# Altium PCB IoTMainBoard.PcbDoc (part 1 of 2)
Units mil, origin at the board's own origin, x right, y up, seen from the top; angles counter-clockwise.
Board outline 3945 x 3790 mil, 2 copper layers (Top Layer, Bottom Layer); 64 components, 75 nets, 263 pads, 93 vias.
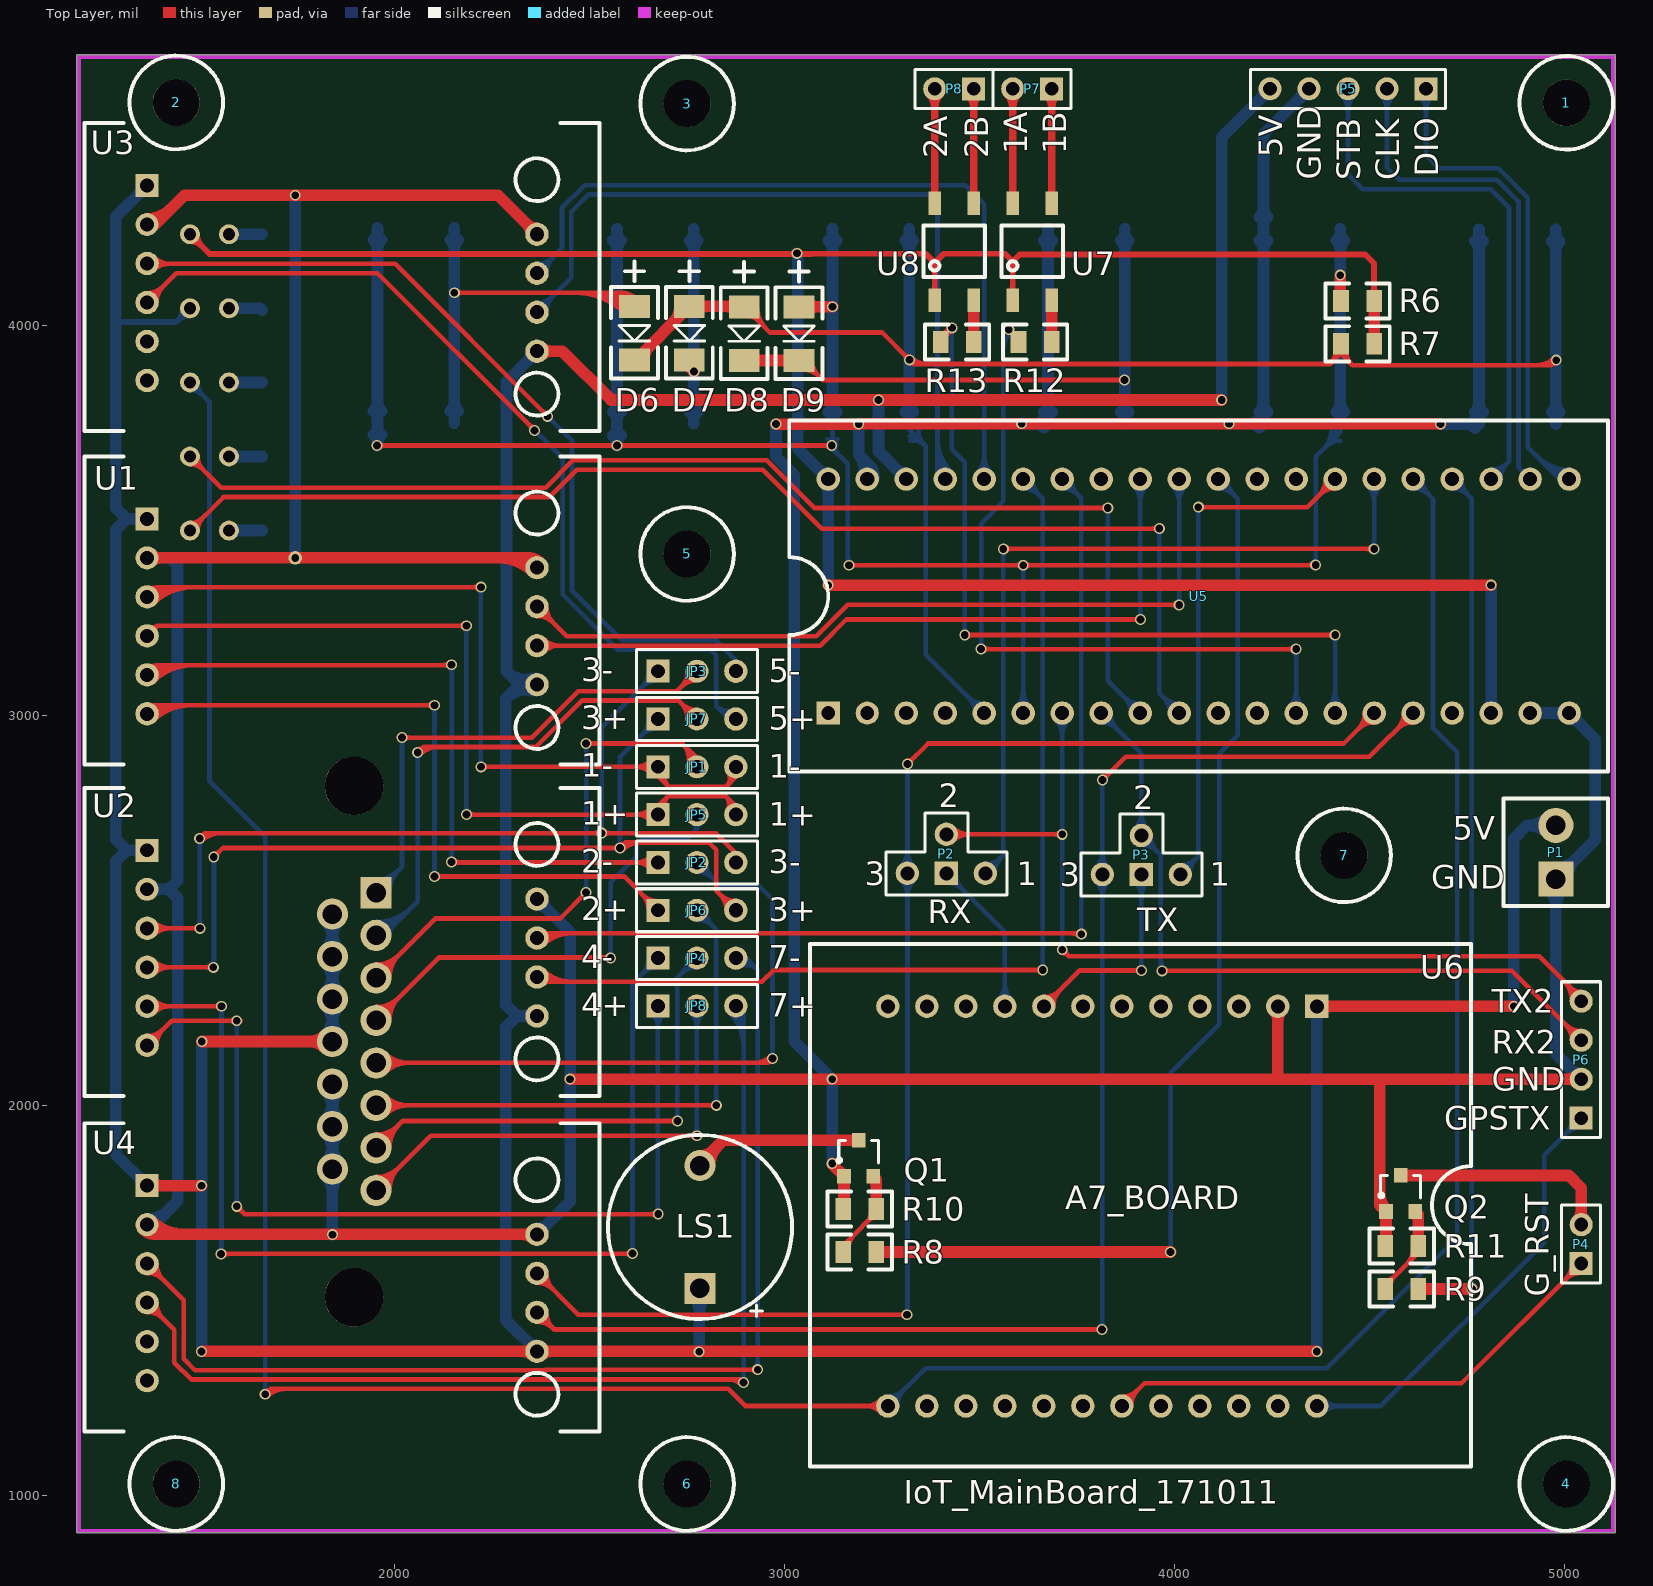
[diagram p0: Top Layer view]
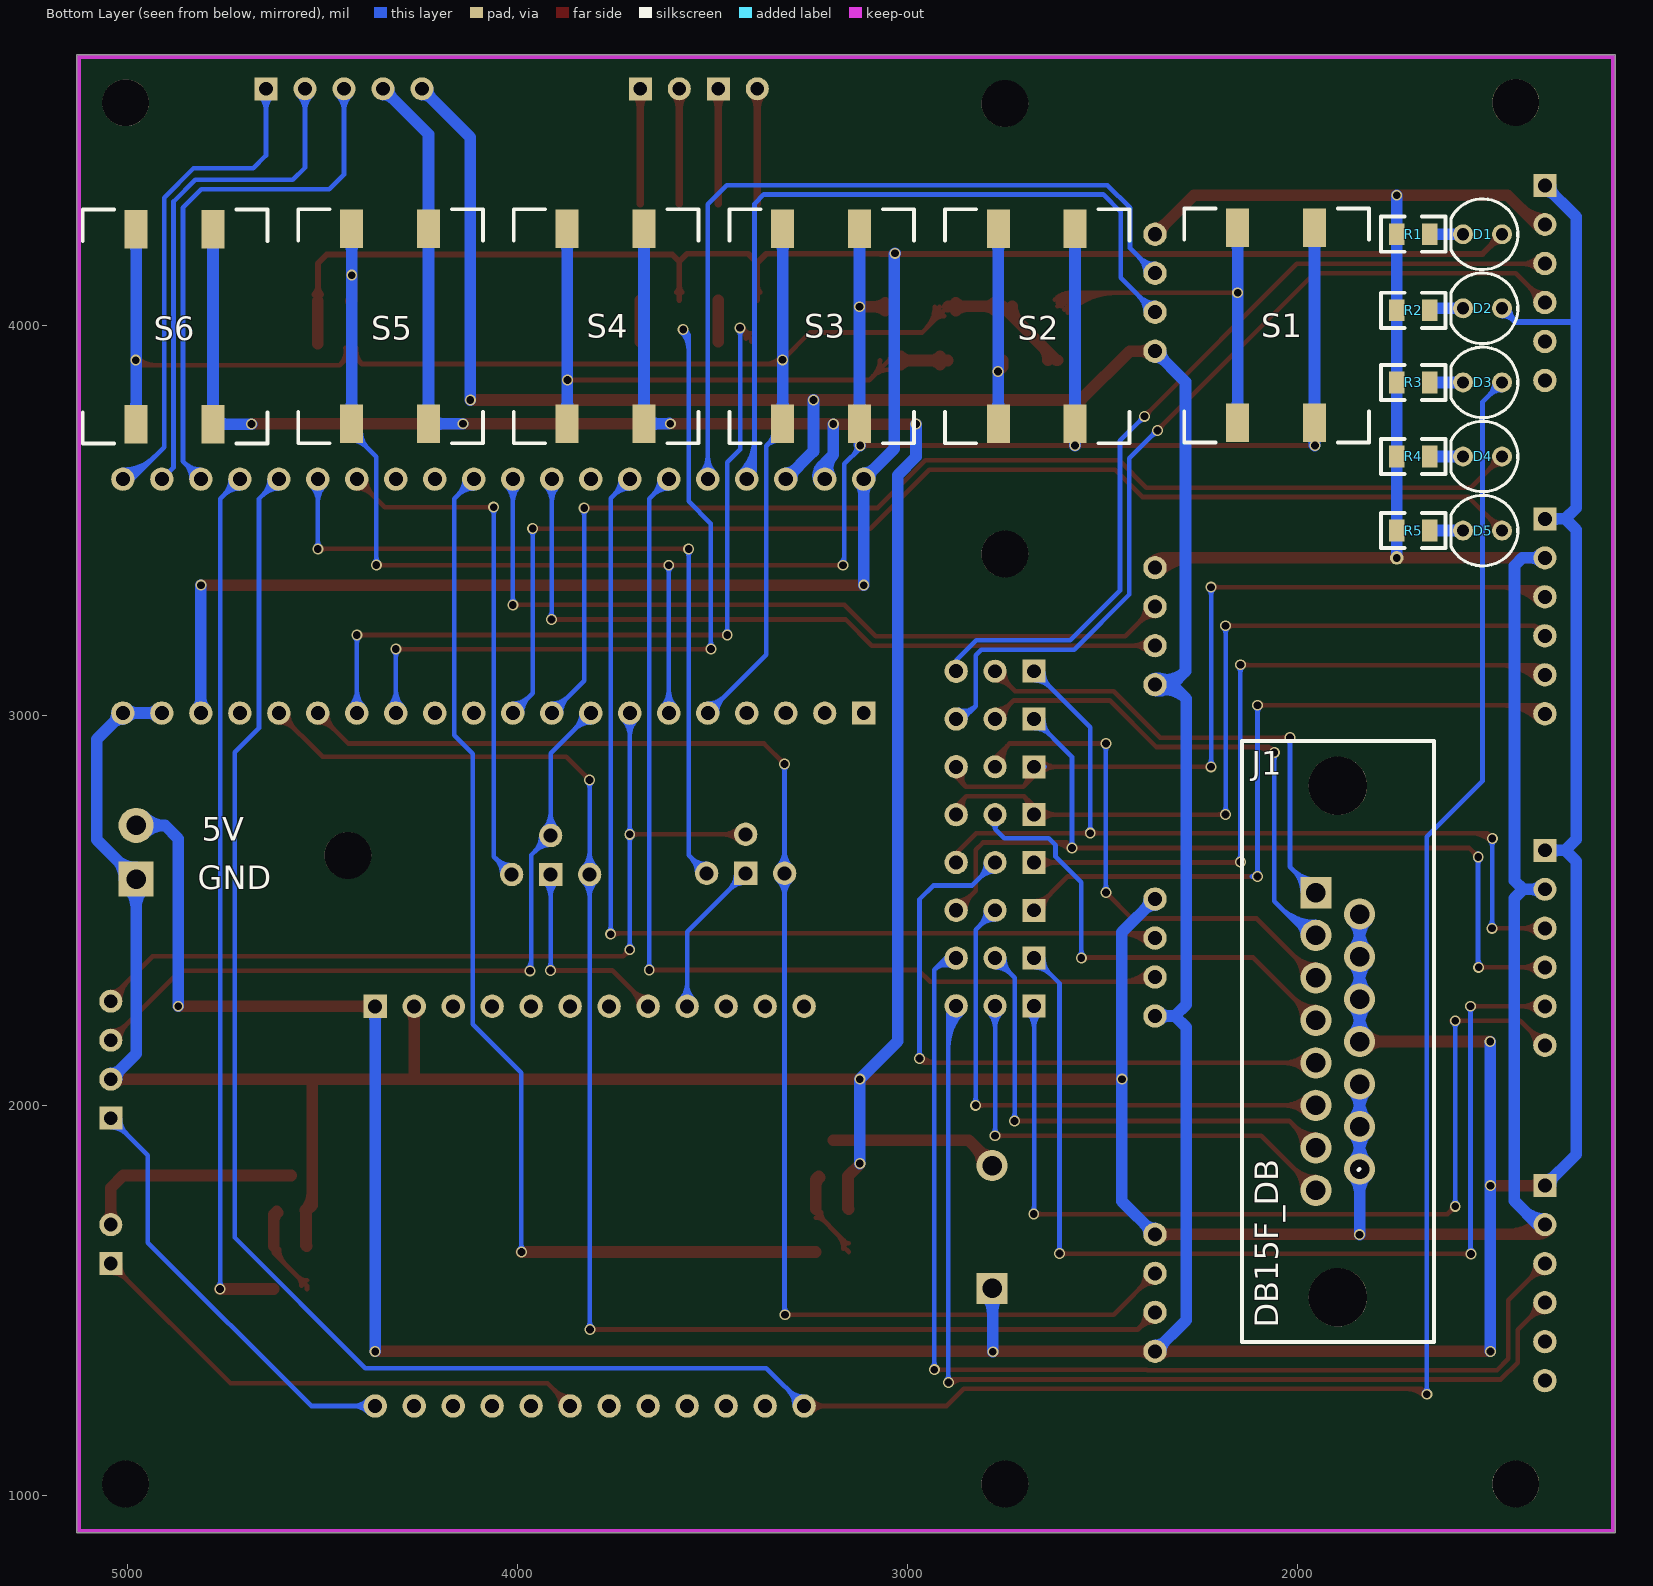
[diagram p1: Bottom Layer view, seen from below]

## Layer stack, top to bottom
Top Layer: signal copper 1.4
Dielectric: dielectric 12.6, FR-4, Dk 4.8
Bottom Layer: signal copper 1.4

## Board outline
1185,4695 1185,905 5130,905 5130,4695 1185,4695

## Design rules (kind name [scope] priority, off if disabled: settings)
Clearance [All] p1: gap=12
ComponentClearance [All] p1 off: gap=10 collisioncheckmode=3 verticalgap=10 showdistances=FALSE
HoleSize [All] p1: absolutevalues=TRUE maxlimit=100 minlimit=10 maxpercent=80.000 minpercent=20.000
PolygonConnect [All] p1: connectstyle=Relief reliefconductorwidth=10 reliefentries=4 polygonreliefangle="90 Angle"
RoutingVias [All] p1: holewidth=20 width=28 viastyle="Through Hole" minholewidth=20 minwidth=25 maxholewidth=20 maxwidth=35
SilkToSilkClearance [All] p1 off: silktosilkclearance=10
SilkscreenOverComponentPads [All] p1 off: minsilkscreentomaskgap=10
SolderMaskExpansion [All] p1: expansion=4
Width [All] p1: maxlimit=30 minlimit=12 preferedwidth=12
24 further rules are at their usual default settings.

## Components (designator, comment, footprint, x,y, rotation, side; value= is the part's Value field where it differs from the comment)
1 "SIP1" hole 5005,4572 r90 top locked
2 "SIP1" hole 1440,4573 r90 top locked
3 "SIP1" hole 2750,4570 r90 top locked
4 "SIP1" hole 5005,1030 r90 top locked
5 "SIP1" hole 2750,3415 r90 top locked
6 "SIP1" hole 2750,1030 r90 top locked
7 "SIP1" hole 4435,2642 r90 top locked
8 "SIP1" hole 1440,1030 r90 top
D1 "LED0" LED0 1525,4235 r0 bottom
D2 "LED0" LED0 1525,4045 r0 bottom
D3 "LED0" LED0 1525,3855 r0 bottom
D4 "LED0" LED0 1525,3665 r0 bottom
D5 "LED0" LED0 1525,3475 r0 bottom
D6 "Diode 1N4001" 1N4148 2555,4100 r270 top
D7 "Diode 1N4001" 1N4148 2695.67,4100 r270 top
D8 "Diode 1N4001" 1N4148 2836.33,4099 r270 top
D9 "Diode 1N4001" 1N4148 2977,4099 r270 top
J1 "D Connector 15" DB15F_DB 2142,1394 r90 bottom locked
JP1 "JUMPER5" CON3 2675.12,2869.16 r0 top
JP2 "JUMPER5" CON3 2675.12,2623.9 r0 top
JP3 "JUMPER5" CON3 2675.12,3114.43 r0 top locked
JP4 "JUMPER5" CON3 2675.12,2378.63 r0 top
JP5 "JUMPER5" CON3 2675.12,2746.53 r0 top locked
JP6 "JUMPER5" CON3 2675.12,2501.26 r0 top
JP7 "JUMPER5" CON3 2675.12,2991.79 r0 top locked
JP8 "JUMPER5" CON3 2675.12,2256 r0 top
LS1 "Bell" BEEP 2783,1689 r90 top locked
P1 "Header 2" Power2 4844,2512 r90 top locked
P2 "Header 4" JUMP3 3415,2596 r0 top
P3 "Header 4" JUMP3 3915,2593 r0 top
P4 "Header 2" HDR1X2 5043,1595 r90 top
P5 "MHDR1X5" HDR1X5 4645,4608 r180 top
P6 "Header 4" HDR1X4 5043,1968 r90 top
P7 "Header 2" HDR1X2 3685,4608 r180 top
P8 "Header 2" HDR1X2 3485,4608 r180 top
Q1 "2N3904" SOT-23 3190,1865 r0 top
Q2 "2N3904" SOT-23 4580,1775 r0 top
R1 "Res2" 0805 1785,4190 r180 bottom
R2 "Res2" 0805 1785,3995 r180 bottom
R3 "Res2" 0805 1785,3810 r180 bottom
R4 "Res2" 0805 1785,3620 r180 bottom
R5 "Res2" 0805 1785,3430 r180 bottom
R6 "Res2" 0805 4387,4019 r0 top
R7 "Res2" 0805 4387,3909 r0 top
R8 "Res2" 0805 3110.24,1580 r0 top
R9 "Res2" 0805 4500,1485 r0 top
R10 "Res2" 0805 3275.24,1780 r180 top
R11 "Res2" 0805 4665.24,1685 r180 top
R12 "Res2" 0805 3560,3914 r0 top
R13 "Res2" 0805 3360,3914 r0 top
S1 "SW-PB" KEY1 2053,4001 r270 bottom locked
S2 "SW-PB" KEY1 2667,3999 r270 bottom locked
S3 "SW-PB" KEY1 3219.75,3999 r270 bottom locked
S4 "SW-PB" KEY1 3772.5,3999 r270 bottom locked
S5 "SW-PB" KEY1 4325.25,3999 r270 bottom locked
S6 "SW-PB" KEY1 4878,3998 r270 bottom locked
U1 "HX711Board" HX711 1205,3665 r0 top locked
U2 "HX711Board" HX711 1205,2815 r0 top locked
U3 "HX711Board" HX711 1205,4520 r0 top locked
U4 "HX711Board" HX711 1205,1955 r0 top locked
U5 "STM32F103C8T6" STM32F103C8T6 3012,2857 r90 top locked
U6 "A7Board" A7BOARD 4760,2415 r270 top locked
U7 "Optoisolator1" SOP4 3585,4314 r0 top
U8 "Optoisolator1" SOP4 3385,4314 r0 top

## Footprints (in the part's own frame and the unit in brackets; to place one, negate y for a bottom-side part, rotate by r counter-clockwise, add the part's x,y. Pads: shape width x height; smd on the part's side, far side on the other; paste and mask are expansions set on the pad)
1N4148 [mm]
  rect 1.5x2 smd: 1(1.27,1.524) 2(4.77,1.524)
  silkscreen extent -1.65,0 5.97,3.05
0805 [mil]
  rect 40x56 smd: 1(40,45) 2(125,45)
  silkscreen extent 0,0 165,90
A7BOARD [mil]
  rect 60x60 hole 36: 1(160,-395)
  round 60 hole 36: 2(160,-495) 3(160,-595) 4(160,-695) 5(160,-795) 6(160,-895) 7(160,-995) 8(160,-1095) 9(160,-1195) 10(160,-1295) 11(160,-1395) 12(160,-1495) 13(1185,-1495) 14(1185,-1395) 15(1185,-1295) 16(1185,-1195) 17(1185,-1095) 18(1185,-995) 19(1185,-895) 20(1185,-795) 21(1185,-695) 22(1185,-595) 23(1185,-495) 24(1185,-395)
  silkscreen extent 0,-1695 1340,0
BEEP [mil]
  rect 80x80 hole 50: 1(-157.48,0)
  round 80 hole 50: 2(157.48,0)
  silkscreen extent -236,-236 236,236
CON3 [mm]
  rect 1.5x1.5 hole 0.9: 1(0,0)
  round 1.5 hole 0.9: 2(2.54,0)
  round 1.524 hole 0.914: 3(5.08,0)
  silkscreen extent -1.4,-1.4 6.48,1.4
DB15F_DB [mil]
  rect 80x80 hole 50: 1(1152,-189.75)
  round 80 hole 50: 2(1043,-189.75) 3(934,-189.75) 4(825,-189.75) 5(716,-189.75) 6(607,-189.75) 7(498,-189.75) 8(389,-189.75) 9(1097.5,-301.75) 10(988.5,-301.75) 11(879.5,-301.75) 12(770.5,-301.75) 13(661.5,-301.75) 14(552.5,-301.75) 15(443.5,-301.75)
  round 150 hole 150: ""(114.6,-246) ""(1426.4,-246)
  silkscreen extent 0,-492 1541,0
HDR1X2 [mm] "Connector; Header; 2 Position"
  rect 1.5x1.5 hole 0.9: 1(0,0)
  round 1.5 hole 0.9: 2(2.54,0)
  silkscreen extent -1.27,-1.27 3.81,1.27
HDR1X4 [mm] "Connector; Header; 4 Position"
  rect 1.5x1.5 hole 0.9: 1(0,0)
  round 1.5 hole 0.9: 2(2.54,0) 3(5.08,0) 4(7.62,0)
  silkscreen extent -1.27,-1.27 8.89,1.27
HDR1X5 [mm] "Connector; Header; 5 Position"
  rect 1.5x1.5 hole 0.9: 1(0,0)
  round 1.5 hole 0.9: 2(2.54,0) 3(5.08,0) 4(7.62,0) 5(10.16,0)
  silkscreen extent -1.27,-1.27 11.43,1.27
hole [mil]
  round 120 hole 120: ""(0,0)
  silkscreen extent -120,-120 120,120
HX711 [mil]
  rect 59.06x59.06 hole 35.43: 1(160,-160)
  round 59.06 hole 35.43: 2(160,-260)
  round 60 hole 36: 3(160,-360) 4(160,-460) 5(160,-560) 6(160,-660) 7(1160,-585) 8(1160,-485) 9(1160,-385) 10(1160,-285)
  silkscreen extent 0,-790 1320,0
JUMP3 [mil]
  round 60 hole 36: 1(100,0) 2(0,100) 3(-100,0)
  rect 60x60 hole 36: 4(0,0)
  silkscreen extent -155,-55 155,155
KEY1 [mm]
  rect 2.508x1.5 smd: 1(-6.35,2.464) 1(6.35,2.464) 2(-6.35,-2.54) 2(6.35,-2.54)
  silkscreen extent -7.62,-6.02 7.62,6.02
LED0 [mm]
  round 1.3 hole 0.8: 1(-1.27,0) 2(1.27,0)
  silkscreen extent -2.3,-2.3 2.06,2.3
Power2 [mil]
  rect 90x90 hole 50: 1(69,-134)
  round 90 hole 50: 2(207,-134)
  silkscreen extent 0,-268 276,0
SOP4 [mil]
  rect 31.5x60 smd: 1(0,-248) 2(100,-248) 3(100,0) 4(0,0)
  silkscreen extent -29,-189 129,-57
SOT-23 [mm]
  rect 0.9x0.95 smd: 1(-0.95,-1.175) 2(0.95,-1.175) 3(0,1.175)
  silkscreen extent -1.39,-0.3 1.3,1.18
STM32F103C8T6 [mil]
  rect 59.06x59.06 hole 35.43: 1(150,-100)
  round 59.06 hole 35.43: 2(150,-200)
  round 60 hole 36: 3(150,-300) 4(150,-400) 5(150,-500) 6(150,-600) 7(150,-700) 8(150,-800) 9(150,-900) 10(150,-1000) 11(150,-1100) 12(150,-1200) 13(150,-1300) 14(150,-1400) 15(150,-1500) 16(150,-1600) 17(150,-1700) 18(150,-1800) 19(150,-1900) 20(150,-2000) 21(750,-2000) 22(750,-1900) 23(750,-1800) 24(750,-1700) 25(750,-1600) 26(750,-1500) 27(750,-1400) 28(750,-1300) 29(750,-1200) 30(750,-1100) 31(750,-1000) 32(750,-900) 33(750,-800) 34(750,-700) 35(750,-600) 36(750,-500) 37(750,-400) 38(750,-300) 39(750,-200) 40(750,-100)
  silkscreen extent 0,-2100 900,0

## Part data
1 2 3 4 5 6 7 8: "Variable Resistor"
D1 D2 D3 D4 D5: "Typical INFRARED GaAs LED"
D6 D7 D8 D9: "1 Amp General Purpose Rectifier"
J1: "Receptacle Assembly, 15 Position, Right Angle"
LS1: "Electrical Bell"
P1 P4 P7 P8: "Header, 2-Pin"
P2 P3 P6: "Header, 4-Pin"
P5: "Header, 5-Pin"
Q1 Q2: "NPN General Purpose Amplifier"
R1 R2 R3 R4 R5 R6 R7 R8 R9 R10 R11 R12 R13: "Resistor"
S1 S2 S3 S4 S5 S6: "Switch"
U5: "STM32F103C8T6 Board"
U7 U8: "4-Pin Phototransistor Optocoupler"

## Free pads (board coordinates)
  round 35 hole 20: 0(1745,3405)

## Via types
v1: diameter 28, hole 20, Top Layer to Bottom Layer, 93 vias

## Nets (pads, with @x,y where several pads share a name; then routed paths per layer and width w, separated by ;. In a path a pad name is that pad's centre, name@x,y a point inside that pad or via, vN(x,y) a via of type N, cw(c..) or ccw(c..) an arc to the next point about the centre after c; other vN are vias at no path point)
1+: JP5.1 JP5.3 U1.4 | length 2461.9
  Top Layer w12: U1.4@1365,3205 1391,3231 ; U1.4@1373.71,3227.37 ccw(c1379.57,3242.43) 1391,3231 ; U1.4@1387.37,3213.71 cw(c1402.43,3219.57) 1391,3231 ; v1@2178.34,3225.34 ccw(c2164.69,3211.69) 2164.69,3231 ccw(c2164.69,3250.31) v1@2178.34,3236.66 ; v1@2184,2746.53 JP5.1@2675.12,2746.53 2675.12,2768.18 2701,2794.06 ; v1(2184,3231) 1391,3231 ; v1@2189.66,2741.34 cw(c2202.18,2728.82) 2202.18,2746.53 ; v1@2189.66,2752.66 ccw(c2204.45,2767.45) 2204.45,2746.53 ; JP5.1@2658.48,2729.89 ccw(c2618.32,2689.73) 2618.32,2746.53 ccw(c2618.32,2803.33) JP5.1@2658.48,2763.17 ; JP5.1@2685.24,2752.05 cw(c2707.94,2764.43) 2689.66,2782.71 ; JP5.1@2695.77,2757.79 cw(c2722.62,2772.43) 2701,2794.06 ; JP5.3@2854.08,2758.08 ccw(c2827.53,2772.64) 2848.94,2794.06 ; 2860.25,2782.75 cw(c2842.14,2764.63) JP5.3@2864.6,2752.3 ; JP5.3@2875.12,2746.53 2875.12,2767.88 2848.94,2794.06 ; 2701,2794.06 2848.94,2794.06
  Bottom Layer w12: v1@2178.34,2752.66 ccw(c2164.69,2766.31) 2184,2766.31 ccw(c2203.31,2766.31) v1@2189.66,2752.66 ; v1@2178.34,3225.34 cw(c2164.69,3211.69) 2184,3211.69 cw(c2203.31,3211.69) v1@2189.66,3225.34 ; v1(2184,2747) v1(2184,3231)
1-: JP1.1 JP1.3 U1.3 | length 2798.9
  Top Layer w12: U1.3@1356.51,3313.49 cw(c1396.38,3273.62) 1396.38,3330 ; U1.3@1366,3304 U1.3@1365,3305 ; U1.3@1373.49,3296.51 cw(c1454.33,3215.67) 1454.33,3330 ; U1.3@1374.51,3327.04 ccw(c1380.07,3339.93) 1390,3330 ; U1.3@1381.97,3288.03 cw(c1483.3,3186.7) 1483.3,3330 ; U1.3@1387.04,3314.51 cw(c1399.93,3320.07) 1390,3330 ; 1425.36,3330 ccw(c1425.36,3244.64) U1.3@1365,3305 ; 2201.46,3330 cw(c2201.46,3310.13) v1@2215.51,3324.18 ; 2202.24,3330 ccw(c2202.24,3348.76) v1@2215.51,3335.49 ; v1(2221.16,2869.16) JP1.1@2675.12,2869.16 2675.12,2845.88 2702.94,2818.06 ; v1@2221.16,3330 1390,3330 ; v1@2226.82,2863.51 cw(c2240.48,2849.85) 2240.48,2869.16 cw(c2240.48,2888.48) v1@2226.82,2874.82 ; JP1.1@2658.48,2852.53 ccw(c2618.32,2812.36) 2618.32,2869.16 ccw(c2618.32,2925.96) JP1.1@2658.48,2885.8 ; JP1.1@2685.46,2864.07 ccw(c2712.12,2850.92) 2691.1,2829.9 ; JP1.1@2696.22,2858.76 ccw(c2727.98,2843.1) 2702.94,2818.06 ; JP1.3@2854.64,2856.64 cw(c2827.86,2840.26) 2850.06,2818.06 ; 2860.83,2828.83 ccw(c2841.23,2848.44) JP1.3@2864.88,2862.9 ; JP1.3@2875.12,2869.16 2875.12,2843.12 2850.06,2818.06 ; U1.3@1365,3305 1390,3330 ; 2702.94,2818.06 2850.06,2818.06
  Bottom Layer w12: v1@2215.51,2874.82 ccw(c2201.85,2888.48) 2221.16,2888.48 ccw(c2240.48,2888.48) v1@2226.82,2874.82 ; v1@2215.51,3324.18 cw(c2201.85,3310.52) 2221.16,3310.52 cw(c2240.48,3310.52) v1@2226.82,3324.18 ; v1@2221,3330 v1(2221.16,3329.84) v1(2221.16,2869.16) ; JP1.1@2647.84,2869.16 JP1.1@2675.12,2869.16
2+: JP6.1 U1.6 | length 2340.1
  Top Layer w12: U1.6@1356.51,3013.49 cw(c1389.14,2980.86) 1389.14,3027 ; U1.6@1373.49,2996.51 cw(c1447.08,2922.92) 1447.08,3027 ; U1.6@1377.11,3025.72 ccw(c1381.23,3032.77) 1387,3027 ; U1.6@1381.97,2988.03 cw(c1476.05,2893.95) 1476.05,3027 ; U1.6@1385.72,3017.11 cw(c1392.77,3021.23) 1387,3027 ; 1418.11,3027 ccw(c1418.11,2951.89) U1.6@1365,3005 1387,3027 ; v1@2096.34,3021.34 ccw(c2082.69,3007.69) 2082.69,3027 ccw(c2082.69,3046.31) v1@2096.34,3032.66 ; v1(2102,2588) 2588.38,2588 JP6.1@2675.12,2501.26 ; v1(2102,3027) 1387,3027 ; v1@2107.66,2582.34 cw(c2121.31,2568.69) 2121.31,2588 cw(c2121.31,2607.31) v1@2107.66,2593.66 ; JP6.1@2651.59,2501.26 ccw(c2594.79,2501.26) 2634.95,2541.43 ccw(c2675.12,2581.59) JP6.1@2675.12,2524.79
  Bottom Layer w12: v1@2096.34,2593.66 ccw(c2082.69,2607.31) 2102,2607.31 ccw(c2121.31,2607.31) v1@2107.66,2593.66 ; v1@2096.34,3021.34 cw(c2082.69,3007.69) 2102,3007.69 cw(c2121.31,3007.69) v1@2107.66,3021.34 ; v1@2102,3026.5 v1(2102,2588) 2116.5,2588 ; v1@2108.77,2583.73 cw(c2116.5,2578.86) 2116.5,2588 ; v1@2108.77,2592.27 ccw(c2116.5,2597.14) 2116.5,2588
2-: JP2.1 U1.5 | length 2384.7
  Top Layer w12: U1.5@1356.51,3113.49 cw(c1396.38,3073.62) 1396.38,3130 ; U1.5@1373.49,3096.51 cw(c1454.33,3015.67) 1454.33,3130 ; U1.5@1374.51,3127.04 ccw(c1380.07,3139.93) 1390,3130 ; U1.5@1381.97,3088.03 cw(c1483.3,2986.7) 1483.3,3130 ; U1.5@1387.04,3114.51 cw(c1399.93,3120.07) 1390,3130 ; 1425.36,3130 ccw(c1425.36,3044.64) U1.5@1365,3105 1390,3130 ; 2124.27,3130 ccw(c2124.27,3152.73) v1@2140.34,3136.66 ; 2129.1,3130 cw(c2129.1,3114.1) v1@2140.34,3125.34 ; v1(2146,2625) 2147.1,2623.9 JP2.1@2675.12,2623.9 ; v1@2146,3130 1390,3130 ; v1@2151.66,2619.34 cw(c2162.65,2608.35) 2162.65,2623.9 ; v1@2151.66,2630.66 ccw(c2167.98,2646.98) 2167.98,2623.9 ; JP2.1@2658.48,2607.26 ccw(c2618.32,2567.1) 2618.32,2623.9 ccw(c2618.32,2680.7) JP2.1@2658.48,2640.53
  Bottom Layer w12: v1@2140.34,2630.66 ccw(c2126.69,2644.31) 2146,2644.31 ccw(c2165.31,2644.31) v1@2151.66,2630.66 ; v1@2140.34,3125.34 cw(c2126.69,3111.69) 2146,3111.69 cw(c2165.31,3111.69) v1@2151.66,3125.34 ; v1(2146,2625) v1(2146,3131)
3+: JP6.3 JP7.1 U2.4 | length 2883.5
  Top Layer w12: U2.4@1365,2355 v1@1533,2355 ; U2.4@1381.97,2338.03 cw(c1422.94,2297.06) 1422.94,2355 cw(c1422.94,2412.94) U2.4@1381.97,2371.97 ; v1@1529.34,2349.34 ccw(c1515.69,2335.69) 1515.69,2355 ccw(c1515.69,2374.31) v1@1529.34,2360.66 ; v1(1536,2638) 1559,2661 v1(2578,2661) 2592,2675 2806,2675 2825,2656 2825,2551.38 JP6.3@2875.12,2501.26 ; v1@1536,2646 ccw(c1536,2665.31) 1549.66,2651.66 ccw(c1563.31,2638) v1@1544,2638 ; v1@2572.34,2655.34 ccw(c2558.69,2641.69) 2558.69,2661 ccw(c2558.69,2680.31) v1@2572.34,2666.66 ; v1@2575.17,2663.83 cw(c2602.14,2636.86) 2602.14,2675 ; v1@2578,2669 ccw(c2578,2688.31) 2591.66,2674.66 ccw(c2605.31,2661) v1@2586,2661 ; v1@2583.66,2655.34 cw(c2631.11,2607.89) 2631.11,2675 ; JP6.3@2851.12,2501.26 ccw(c2793.18,2501.26) 2834.15,2542.24 ccw(c2875.12,2583.21) JP6.3@2875.12,2525.26
  Bottom Layer w12: v1@1529.34,2360.66 ccw(c1512.07,2377.93) 1536.5,2377.93 ; v1@1530.34,2632.34 cw(c1515.48,2617.48) 1536.5,2617.48 ; v1@1536.5,2356.5 v1@1536.5,2647 ; 1536.5,2370.69 ccw(c1550.69,2370.69) v1@1540.66,2360.66 ; 1536.5,2619.89 cw(c1554.11,2619.89) v1@1541.66,2632.34 ; v1@2572.34,2666.66 ccw(c2558.69,2680.31) 2578,2680.31 ccw(c2597.31,2680.31) v1@2583.66,2666.66 ; v1(2578,2661) 2578,2894.68 JP7.1@2675.12,2991.8 ; JP7.1@2651.59,2991.8 cw(c2594.79,2991.8) 2634.95,2951.63 cw(c2675.12,2911.47) JP7.1@2675.12,2968.27
  other v1: 1535,2355
3-: JP2.3 JP3.1 U2.3 | length 2742.7
  Top Layer w12: U2.3@1365,2455 v1(1501,2455) ; U2.3@1381.97,2438.03 cw(c1422.94,2397.06) 1422.94,2455 cw(c1422.94,2512.94) U2.3@1381.97,2471.97 ; v1@1495.34,2449.34 ccw(c1481.69,2435.69) 1481.69,2455 ccw(c1481.69,2474.31) v1@1495.34,2460.66 ; v1@1497.17,2687.83 cw(c1524.14,2660.86) 1524.14,2699 ; v1(1500,2685) 1514,2699 2464,2699 2507,2699 v1(2531,2699) 2824.01,2699 2875.12,2647.89 JP2.3@2875.12,2623.9 ; v1@1500,2693 ccw(c1500,2712.31) 1513.66,2698.66 ccw(c1527.31,2685) v1@1508,2685 ; v1@1505.66,2679.34 cw(c1553.11,2631.89) 1553.11,2699 ; v1@2525.34,2693.34 ccw(c2511.69,2679.69) 2511.69,2699 ccw(c2511.69,2718.31) v1@2525.34,2704.66 ; v1@2536.66,2693.34 cw(c2550.31,2679.69) 2550.31,2699 cw(c2550.31,2718.31) v1@2536.66,2704.66
  Bottom Layer w12: v1@1494.34,2679.34 cw(c1479.48,2664.48) 1500.5,2664.48 ; v1@1495.34,2460.66 ccw(c1482.89,2473.11) 1500.5,2473.11 ; 1500.5,2475.52 ccw(c1521.52,2475.52) v1@1506.66,2460.66 ; 1500.5,2666.89 cw(c1518.11,2666.89) v1@1505.66,2679.34 ; v1@1500.5,2685 1500.5,2455.5 v1(1501,2455) ; v1@2525.34,2704.66 ccw(c2511.69,2718.31) 2531,2718.31 ccw(c2550.31,2718.31) v1@2536.66,2704.66 ; v1(2531,2699) 2531,2970.31 JP3.1@2675.12,3114.43 ; JP3.1@2651.59,3114.43 cw(c2594.79,3114.43) 2634.95,3074.26 cw(c2675.12,3034.1) JP3.1@2675.12,3090.9
3.3V: D1.1 R6.2 R7.2 U5.18 U5.40 U7.1 U8.1 | length 6797.5
  Top Layer w15: D1.1@1475,4216.91 cw(c1475,4173.24) 1505.88,4204.12 cw(c1536.76,4235) D1.1@1493.09,4235 ; D1.1@1475,4235 1525.5,4184.5 3068.5,4184.5 3069,4185 3362,4185 3385,4162 ; 3012.69,4184.5 ccw(c3012.69,4205.31) v1@3027.4,4190.6 ; v1@3036.6,4190.6 ccw(c3051.31,4205.31) 3051.31,4184.5 ; U8.1@3379.17,4086.08 ccw(c3365.09,4100.16) 3385,4100.16 ccw(c3404.91,4100.16) U8.1@3390.83,4086.08 ; U8.1@3385,4066 3385,4162 ; U7.1@3579.17,4086.08 ccw(c3565.09,4100.16) 3585,4100.16 ccw(c3604.91,4100.16) U7.1@3590.83,4086.08 ; U7.1@3585,4066 3585,4165 ; R6.2@4503.16,4080.84 ccw(c4481.82,4102.18) 4512,4102.18 ccw(c4542.18,4102.18) R6.2@4520.84,4080.84 ; R6.2@4512,4064 4512,4160 4489,4183 3603,4183 3585,4165 ; 3385,4162 3408,4185 3565,4185 3585,4165
  Top Layer w30: v1(3112,3335) v1(4812,3335) ; R7.2@4512,3954 R6.2@4512,4064
  Bottom Layer w30: v1(3032,4186) 3034,4184 3034,3685 U5.40@3112,3607 v1(3112,3335) ; U5.40@3097,3607 ccw(c3060.79,3607) 3086.39,3632.61 ccw(c3112,3658.21) U5.40@3112,3622 ; U5.40@3101.39,3596.39 cw(c3075.79,3570.79) 3112,3570.79 cw(c3148.21,3570.79) U5.40@3122.61,3596.39 ; U5.18@4801.39,3017.61 ccw(c4775.79,3043.21) 4812,3043.21 ccw(c4848.21,3043.21) U5.18@4822.61,3017.61 ; U5.18@4812,3007 v1(4812,3335)
4+: JP8.1 U2.6 | length 2727.6
  Top Layer w12: U2.6@1365,2155 1428,2218 v1@1605,2218 ; U2.6@1365,2179 ccw(c1365,2236.94) 1405.97,2195.97 ccw(c1446.94,2155) U2.6@1389,2155 ; v1@1589.34,2212.34 ccw(c1575.69,2198.69) 1575.69,2218 ccw(c1575.69,2237.31) v1@1589.34,2223.66 ; v1@1595,1734 cw(c1595,1714.69) 1608.66,1728.34 cw(c1622.31,1742) v1@1603,1742 ; v1(1595,1742) 1615,1722 v1(2676,1722) ; v1@2670.34,1716.34 ccw(c2656.69,1702.69) 2656.69,1722 ccw(c2656.69,1741.31) v1@2670.34,1727.66
  Bottom Layer w12: v1@1589.34,1747.66 ccw(c1575.69,1761.31) 1595,1761.31 ccw(c1614.31,1761.31) v1@1600.66,1747.66 ; v1@1589.34,2212.34 cw(c1575.69,2198.69) 1595,2198.69 cw(c1614.31,2198.69) v1@1600.66,2212.34 ; v1(1595,1742) v1(1595,2218) ; JP8.1@2658.48,2239.36 cw(c2618.32,2199.2) 2675.12,2199.2 cw(c2731.92,2199.2) JP8.1@2691.75,2239.36 ; v1@2670.34,1727.66 ccw(c2658.82,1739.18) 2675.12,1739.18 ; v1@2675.12,1722 JP8.1@2675.12,2256 ; 2675.12,1743.44 ccw(c2697.44,1743.44) v1@2681.66,1727.66
4-: JP4.1 U2.5 | length 3027.9
  Top Layer w12: U2.5@1365,2255 v1(1556,2255) ; U2.5@1381.97,2238.03 cw(c1422.94,2197.06) 1422.94,2255 cw(c1422.94,2312.94) U2.5@1381.97,2271.97 ; v1@1550.34,2249.34 ccw(c1536.69,2235.69) 1536.69,2255 ccw(c1536.69,2274.31) v1@1550.34,2260.66 ; v1(1555,1620) v1@2610,1620 ; v1@1560.66,1614.34 cw(c1574.31,1600.69) 1574.31,1620 cw(c1574.31,1639.31) v1@1560.66,1625.66 ; 2588.27,1620 ccw(c2588.27,1642.73) v1@2604.34,1626.66 ; 2593.1,1620 cw(c2593.1,1604.1) v1@2604.34,1615.34
  Bottom Layer w12: v1@1549.34,1625.66 ccw(c1533.27,1641.73) 1556,1641.73 ; v1@1550.34,2249.34 cw(c1536.69,2235.69) 1556,2235.69 cw(c1575.31,2235.69) v1@1561.66,2249.34 ; v1@1556,1620 v1(1556,2255) ; 1556,1636.9 ccw(c1571.9,1636.9) v1@1560.66,1625.66 ; v1@2604.34,1626.66 ccw(c2590.69,1640.31) 2610,1640.31 ccw(c2629.31,1640.31) v1@2615.66,1626.66 ; v1(2610,1621) 2610,2313.51 JP4.1@2675.12,2378.63 ; JP4.1@2651.59,2378.63 cw(c2594.79,2378.63) 2634.95,2338.47 cw(c2675.12,2298.3) JP4.1@2675.12,2355.11
5+: JP7.3 U3.4 | length 2541.9
  Top Layer w12: U3.4@1365,4060 1440,4135 1956,4135 v1(2359,3732) ; U3.4@1365,4084 ccw(c1365,4141.94) 1405.97,4100.97 ccw(c1446.94,4060) U3.4@1389,4060 ; v1@2351,3732 ccw(c2331.69,3732) 2345.34,3745.66 ccw(c2359,3759.31) v1@2359,3740
  Bottom Layer w12: v1@2359,3724 cw(c2359,3704.69) 2372.66,3718.34 cw(c2386.31,3732) v1@2367,3732 ; v1(2359,3732) 2431,3660 2431,3311.06 2572.56,3169.5 2810.5,3169.5 2825,3155 2825,3025 ; 2838.9,3011.1 ccw(c2861.63,3033.82) JP7.3@2871.45,3003.22 ; 2846.11,3003.89 cw(c2834.01,2991.8) JP7.3@2851.12,2991.8 ; JP7.3@2867.78,3014.65 cw(c2854.87,3054.87) 2825,3025 ; JP7.3@2875.12,2991.8 2858.2,2991.8 2825,3025
5-: JP3.3 U3.3 | length 2361.4
  Top Layer w12: U3.3@1365,4160 1366,4159 2001,4159 v1(2392,3768) ; U3.3@1373.49,4168.49 ccw(c1396.38,4191.38) 1396.38,4159 ; U3.3@1381.97,4143.03 cw(c1420.53,4104.47) 1420.53,4159 ; U3.3@1381.97,4176.97 ccw(c1425.36,4220.36) 1425.36,4159 ; v1@2384,3768 ccw(c2364.69,3768) 2378.34,3781.66 ccw(c2392,3795.31) v1@2392,3776
  Bottom Layer w12: v1@2392,3760 cw(c2392,3740.69) 2405.66,3754.34 cw(c2419.31,3768) v1@2400,3768 ; v1(2392,3768) 2455,3705 2455,3321 2582.5,3193.5 2823.5,3193.5 2875.12,3141.88 JP3.3@2875.12,3114.43
5V: D2.1 J1.9 J1.10 J1.11 J1.12 LS1.1 P1.2 P5.5 U1.1 U1.7 U2.1 U2.7 U3.1 U3.7 U4.1 U4.7 U5.38 U6.1 | length 17330
  Top Layer w30: U4.1@1365,1795 v1(1505,1795) ; U4.1@1375.27,1784.73 cw(c1400.07,1759.93) 1400.07,1795 cw(c1400.07,1830.07) U4.1@1375.27,1805.27 ; v1(1505,1370) U4.7@2365,1370 v1(4365,1370) ; v1@1505,2164 v1(1505.5,2164.5) J1.12@1840.25,2164.5 ; J1.12@1822.57,2146.82 ccw(c1779.89,2104.14) 1779.89,2164.5 ccw(c1779.89,2224.86) J1.12@1822.57,2182.18 ; U4.7@2354.39,1359.39 ccw(c2328.79,1333.79) 2328.79,1370 ccw(c2328.79,1406.21) U4.7@2354.39,1380.61 ; U3.7@2365,3935 2430,3935 2555,3810 v1(3241,3810) v1(4121,3810) ; U4.7@2375.61,1359.39 cw(c2401.21,1333.79) 2401.21,1370 cw(c2401.21,1406.21) U4.7@2375.61,1380.61 ; U3.7@2375.61,3924.39 cw(c2401.21,3898.79) 2401.21,3935 cw(c2401.21,3971.21) U3.7@2375.61,3945.61 ; U6.1@4365,2255 v1(4870,2255) ; U6.1@4375.61,2244.39 cw(c4401.21,2218.79) 4401.21,2255 cw(c4401.21,2291.21) U6.1@4375.61,2265.61 ; P1.2@4974,2715 P1.2@4978,2719 P1.2@4980,2717
  Bottom Layer w15: 1285,4010 1440,4010 D2.1@1475,4045 ; D2.1@1456.91,4045 cw(c1413.24,4045) 1444.12,4014.12 cw(c1475,3983.24) D2.1@1475,4026.91
  Bottom Layer w30: U4.1@1350.47,1795 ccw(c1315.4,1795) 1340.2,1819.8 ccw(c1365,1844.6) U4.1@1365,1809.53 ; U3.1@1350.47,4360 cw(c1315.4,4360) 1340.2,4335.2 cw(c1365,4310.4) U3.1@1365,4345.47 ; U2.1@1354.73,2644.73 ccw(c1329.93,2619.93) 1329.93,2655 ccw(c1329.93,2690.07) U2.1@1354.73,2665.27 ; U1.1@1354.73,3494.73 ccw(c1329.93,3469.93) 1329.93,3505 ccw(c1329.93,3540.07) U1.1@1354.73,3515.27 ; U4.1@1365,1795 1285,1875 1285,2627 1313,2655 ; U2.1@1365,2655 1313,2655 ; U1.1@1365,3505 1313,3505 ; U3.1@1365,4360 1285,4280 1285,4010 1285,3533 1313,3505 ; v1(1505,1370) v1(1505,1795) v1@1505,2164 ; J1.12@1822.57,2182.18 ccw(c1779.89,2224.86) 1840.25,2224.86 ccw(c1900.61,2224.86) J1.12@1857.93,2182.18 ; J1.11@1822.57,2255.82 cw(c1779.89,2213.14) 1840.25,2213.14 cw(c1900.61,2213.14) J1.11@1857.93,2255.82 ; J1.11@1822.57,2291.18 ccw(c1779.89,2333.86) 1840.25,2333.86 ccw(c1900.61,2333.86) J1.11@1857.93,2291.18 ; J1.10@1822.57,2364.82 cw(c1779.89,2322.14) 1840.25,2322.14 cw(c1900.61,2322.14) J1.10@1857.93,2364.82 ; J1.10@1822.57,2400.18 ccw(c1779.89,2442.86) 1840.25,2442.86 ccw(c1900.61,2442.86) J1.10@1857.93,2400.18 ; J1.9@1822.57,2473.82 cw(c1779.89,2431.14) 1840.25,2431.14 cw(c1900.61,2431.14) J1.9@1857.93,2473.82 ; J1.12@1840.25,2164.5 J1.11@1840.25,2273.5 J1.10@1840.25,2382.5 J1.9@1840.25,2491.5 ; 2322.73,3081.73 cw(c2357.06,3047.41) U1.7@2368.55,3094.57 ; 2323.43,3077.57 ccw(c2356.54,3110.67) U1.7@2368.99,3065.54 ; U4.7@2350,1370 ccw(c2313.79,1370) 2339.39,1395.61 ccw(c2365,1421.21) U4.7@2365,1385 ; U3.7@2350,3935 cw(c2313.79,3935) 2339.39,3909.39 cw(c2365,3883.79) U3.7@2365,3920 ; U2.7@2354.39,2219.39 ccw(c2328.79,2193.79) 2328.79,2230 ccw(c2328.79,2266.21) U2.7@2354.39,2240.61 ; U1.7@2354.39,3069.39 ccw(c2328.79,3043.79) 2328.79,3080 ccw(c2328.79,3116.21) U1.7@2354.39,3090.61 ; U1.7@2361.01,3094.46 cw(c2340.78,3167.78) 2287,3114 ; U1.7@2361.45,3065.43 ccw(c2342.28,2986.73) 2285,3044 ; U4.7@2365,1370 2285,1450 2285,2201 2314,2230 ; U2.7@2365,2230 2314,2230 ; U1.7@2365,3080 2321,3080 ; U3.7@2365,3935 2287,3857 2287,3114 ; LS1.1@2765.32,1513.84 cw(c2727.47,1475.99) 2781,1475.99 ; v1(2781,1369) 2781,1529.52 LS1.1@2783,1531.52 ; 2781,1466.34 cw(c2848.18,1466.34) LS1.1@2800.68,1513.84 ; v1(3241,3810) 3241,3678 U5.38@3312,3607 U5.38@3315,3607 ; U5.38@3297,3607 ccw(c3260.79,3607) 3286.39,3632.61 ccw(c3312,3658.21) U5.38@3312,3622 ; v1(4121,3810) 4121,4484 P5.5@4245,4608 ; P5.5@4230.47,4608 cw(c4195.4,4608) 4220.2,4583.2 cw(c4245,4558.4) P5.5@4245,4593.47 ; U6.1@4354.39,2244.39 cw(c4328.79,2218.79) 4365,2218.79 cw(c4401.21,2218.79) U6.1@4375.61,2244.39 ; v1(4365,1370) U6.1@4365,2255 ; v1(4870,2255) 4870,2685 4904,2719 P1.2@4978,2719 ; P1.2@4956.79,2697.79 ccw(c4905.57,2646.57) 4905.57,2719 ccw(c4905.57,2791.43) P1.2@4956.79,2740.21 ; 1313,2655 1285,2683 1285,3477 1313,3505 ; 2285,3044 2285,2259 2314,2230 ; 2285,3044 2321,3080 ; 2287,3114 2321,3080
6+: U3.6
6-: U3.5
7+: JP8.3 U4.4 | length 3024.5
  Top Layer w12: U4.4@1365,1471 cw(c1365,1413.06) 1405.97,1454.03 cw(c1446.94,1495) U4.4@1389,1495 ; U4.4@1365,1495 1435,1425 1435,1341.06 1478.06,1298 2887,1298 v1(2895,1290) ; 2856.37,1298 cw(c2856.37,1251.37) v1@2889.34,1284.34
  Bottom Layer w12: JP8.3@2858.15,2239.03 cw(c2769.18,2150.06) 2895,2150.06 ; JP8.3@2866.63,2247.51 cw(c2798.15,2179.03) 2895,2179.03 ; v1@2889.34,1295.66 ccw(c2875.69,1309.31) 2895,1309.31 ccw(c2914.31,1309.31) v1@2900.66,1295.66 ; v1(2895,1290) 2895,2236.12 JP8.3@2875.12,2256 cw(c2827.12,2208) 2895,2208
7-: JP4.3 U4.3 | length 3138.8
  Top Layer w12: U4.3@1365,1571 cw(c1365,1513.06) 1405.97,1554.03 cw(c1446.94,1595) U4.3@1389,1595 ; U4.3@1365,1595 1459,1501 1459,1351 1488,1322 2384.88,1322 2385.88,1323 v1(2931,1323) ; v1@2925.34,1317.34 ccw(c2911.69,1303.69) 2911.69,1323 ccw(c2911.69,1342.31) v1@2925.34,1328.66
  Bottom Layer w12: JP4.3@2880.24,2367.78 cw(c2894.82,2336.93) 2918.94,2361.06 ; JP4.3@2885.37,2356.93 cw(c2902.55,2320.55) 2931,2349 ; 2906.89,2373.11 ccw(c2887.08,2353.3) JP4.3@2875.12,2378.63 2901.37,2378.63 2931,2349 ; v1@2925.34,1328.66 ccw(c2911.69,1342.31) 2931,1342.31 ccw(c2950.31,1342.31) v1@2936.66,1328.66 ; v1(2931,1323) 2931,2349
8+: U4.6
8-: U4.5
BEEP: R8.2 U5.30 | length 2950.1
  Top Layer w30: R8.2@3235.24,1625 v1(3990,1625)
  Bottom Layer w12: v1@3984.34,1630.66 ccw(c3970.69,1644.31) 3990,1644.31 ccw(c4009.31,1644.31) v1@3995.66,1630.66 ; v1(3990,1625) 3990,2084 4115,2209 4115,2903 4162,2950 4162,3557 U5.30@4112,3607 ; U5.30@4112,3583 cw(c4112,3525.06) 4152.97,3566.03 cw(c4193.94,3607) U5.30@4136,3607
CLK: P5.2 U5.22 | length 1388.7
  Bottom Layer w12: P5.2@4528.36,4591.36 cw(c4488.2,4551.2) 4545,4551.2 cw(c4601.8,4551.2) P5.2@4561.64,4591.36 ; P5.2@4545,4608 4545,4406 4576,4375 4826,4375 4882,4319 4882,3637 U5.22@4912,3607
DIO: P5.1 U5.21 | length 1550.7
  Bottom Layer w12: P5.1@4628.36,4591.36 cw(c4588.2,4551.2) 4645,4551.2 cw(c4701.8,4551.2) P5.1@4661.64,4591.36 ; P5.1@4645,4608 4645,4437 4678,4404 4830.94,4404 4906,4328.94 4906,3689 4988,3607 U5.21@5012,3607 cw(c5012,3664.94) 4971.03,3623.97 ; 4930.06,3664.94 ccw(c5012,3746.88) U5.21@5012,3631 ; 4950.54,3644.46 ccw(c5012,3705.91) U5.21@5012,3619
DOUT1: U1.9 U5.31 | length 2276.5
  Top Layer w12: U1.9@2365,3256 cw(c2365,3198.06) 2405.97,3239.03 cw(c2446.94,3280) U1.9@2389,3280 ; U1.9@2365,3280 2441,3204 3081.06,3204 3161.56,3284.5 v1(4012,3284.5) ; v1@4006.34,3278.84 ccw(c3992.69,3265.19) 3992.69,3284.5 ccw(c3992.69,3303.81) v1@4006.34,3290.16
  Bottom Layer w12: U5.31@3995.03,3590.03 cw(c3954.06,3549.06) 4012,3549.06 cw(c4069.94,3549.06) U5.31@4028.97,3590.03 ; v1@4006.34,3290.16 ccw(c3992.69,3303.81) 4012,3303.81 ccw(c4031.31,3303.81) v1@4017.66,3290.16 ; v1@4012,3285 U5.31@4012,3607
DOUT2: U2.9 U5.34 | length 2918.1
  Top Layer w12: U2.9@2373.49,2421.51 cw(c2422.94,2372.06) 2422.94,2442 ; U2.9@2381.97,2413.03 cw(c2451.91,2343.09) 2451.91,2442 ; U2.9@2381.97,2446.97 ccw(c2393.97,2458.97) 2393.97,2442 ccw(c2393.97,2401.03) U2.9@2365,2430 2377,2442 v1@3761,2442 ; 3736.86,2442 cw(c3736.86,2415.86) v1@3755.34,2434.34 ; 3746.51,2442 ccw(c3746.51,2454.49) v1@3755.34,2445.66
  Bottom Layer w12: U5.34@3712,3583 cw(c3712,3525.06) 3752.97,3566.03 cw(c3793.94,3607) U5.34@3736,3607 ; U5.34@3712,3607 3761,3558 v1(3761,2440) ; v1@3755.34,2445.66 ccw(c3741.69,2459.31) 3761,2459.31 ccw(c3780.31,2459.31) v1@3766.66,2445.66
DOUT3: U3.9 U5.36 | length 2208.9
  Bottom Layer w12: U3.9@2365,4135 2429,4199 2429,4303 2487,4361 3463,4361 3512,4312 U5.36@3512,3607 ; U3.9@2365,4159 ccw(c2365,4216.94) 2405.97,4175.97 ccw(c2446.94,4135) U3.9@2389,4135 ; U5.36@3495.03,3623.97 ccw(c3454.06,3664.94) 3512,3664.94 ccw(c3569.94,3664.94) U5.36@3528.97,3623.97
DOUT4: P2.3 U4.9 U5.15 | length 4144.8
  Top Layer w12: U4.9@2365,1546 cw(c2365,1488.06) 2405.97,1529.03 cw(c2446.94,1570) U4.9@2389,1570 ; U4.9@2365,1570 2471,1464 v1(3314,1464) ; v1@3308.34,1458.34 ccw(c3294.69,1444.69) 3294.69,1464 ccw(c3294.69,1483.31) v1@3308.34,1469.66 ; v1(3315,2876) 3368,2929 4434,2929 U5.15@4512,3007 U5.15@4514,3005 ; v1@3315,2884 ccw(c3315,2903.31) 3328.66,2889.66 ccw(c3342.31,2876) v1@3323,2876 ; U5.15@4488,3007 cw(c4430.06,3007) 4471.03,2966.03 cw(c4512,2925.06) U5.15@4512,2983
  Bottom Layer w12: P2.3@3298.03,2579.03 cw(c3257.06,2538.06) 3315,2538.06 cw(c3372.94,2538.06) P2.3@3331.97,2579.03 ; P2.3@3298.03,2612.97 ccw(c3257.06,2653.94) 3315,2653.94 ccw(c3372.94,2653.94) P2.3@3331.97,2612.97 ; v1@3308.34,1469.66 ccw(c3292.27,1485.73) 3315,1485.73 ; v1@3309.34,2870.34 cw(c3295.69,2856.69) 3315,2856.69 cw(c3334.31,2856.69) v1@3320.66,2870.34 ; v1(3314,1464) 3315,1465 P2.3@3315,2596 v1(3315,2876) ; 3315,1480.9 ccw(c3330.9,1480.9) v1@3319.66,1469.66